# Altium PCB etapa_1.PcbDoc (part 2 of 2)
Units mm, origin at the board's own origin, x right, y up, seen from the top; angles counter-clockwise.
Board outline 39 x 30.7 mm, 4 copper layers (Top Layer, X, Y, Bottom Layer); 218 components, 89 nets, 624 pads, 178 vias.
Unrouted connection lines stored in the file: 2.
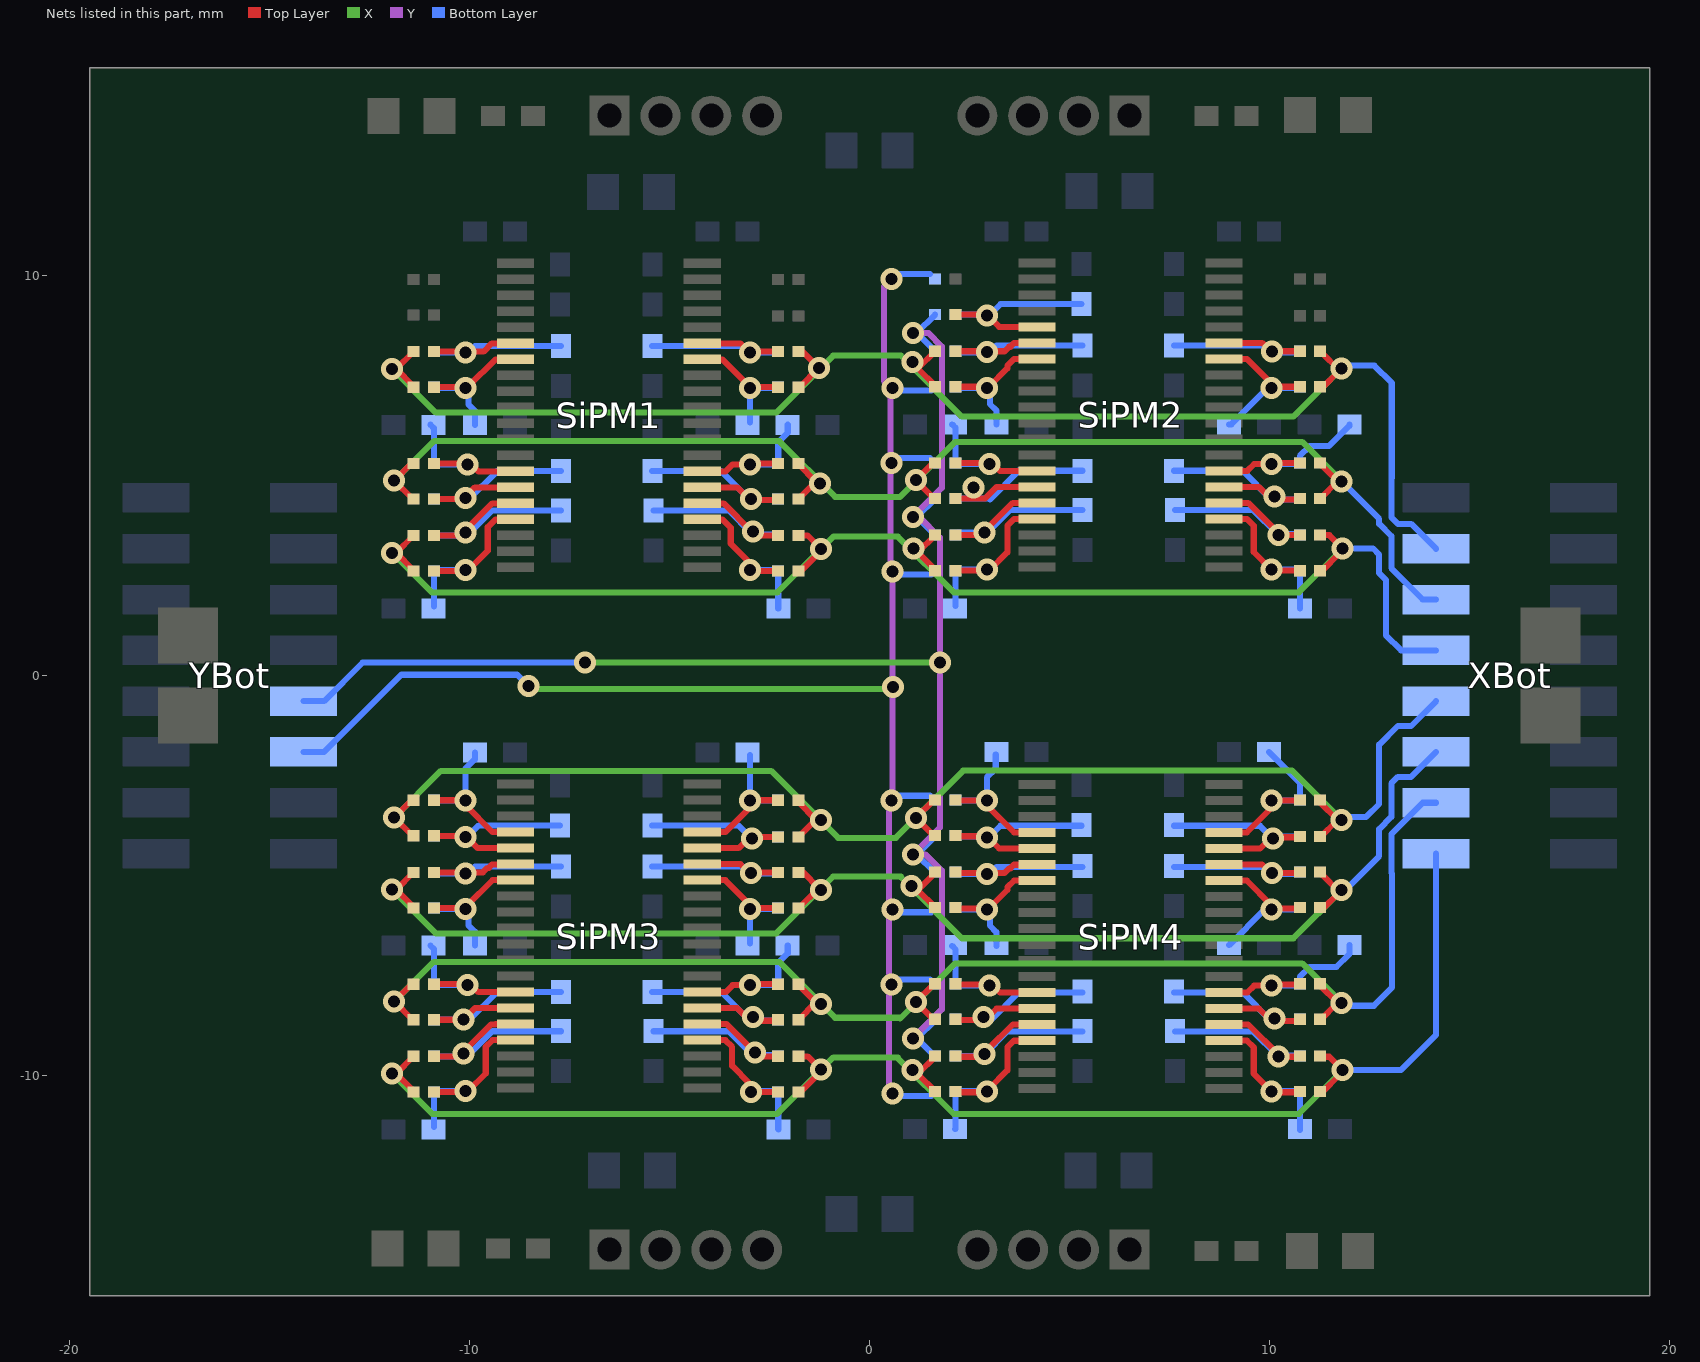
[diagram p4: the nets of this part, all layers, seen from the top]

## Via types
v1: diameter 0.55, hole 0.3, Top Layer to Bottom Layer, 154 vias
v2: diameter 0.6, hole 0.3, Top Layer to Bottom Layer, 24 vias

## Nets (pads, with @x,y where several pads share a name; then routed paths per layer and width w, separated by ;. In a path a pad name is that pad's centre, name@x,y a point inside that pad or via, vN(x,y) a via of type N, cw(c..) or ccw(c..) an arc to the next point about the centre after c; other vN are vias at no path point) (continued)
NetR7y_1: R7y.1 R15y.1 R23y.1 R31y.1 R39y.1 R47y.1 R55y.1 R63y.1 YBot.12 | length 45.3
  Y w0.152: v1@0.487,-10.358 0.487,-3.18 v1(0.543,-3.124) ; v1(0.543,9.916) 0.356,9.728 0.356,7.365 0.522,7.198 0.522,2.647 v1(0.569,2.601) v1@0.569,-3.099
  X w0.152: v1(-8.534,-0.254) -8.534,-0.406 -8.484,-0.457 -8.357,-0.33 0.559,-0.33 0.584,-0.305 v1(0.584,-0.279)
  Bottom Layer w0.152: YBot.12@-14.159,-1.905 -13.64,-1.905 -11.709,0.025 -8.814,0.025 v1(-8.534,-0.254) ; v1(0.543,-7.721) 0.666,-7.599 R55y.1@1.512,-7.599 ; v1(0.543,-3.124) 0.666,-3.001 R39y.1@1.512,-3.001 ; v1(0.543,5.319) 0.666,5.441 R23y.1@1.512,5.441 ; v1(0.543,9.916) 0.666,10.039 R7y.1@1.512,10.039 ; v1(0.569,-5.842) 0.64,-5.914 1.537,-5.914 R47y.1@1.634,-5.816 ; v1(0.569,2.601) 0.64,2.529 1.537,2.529 R31y.1@1.634,2.626 ; v1(0.569,7.198) 0.64,7.126 1.537,7.126 R15y.1@1.634,7.224 ; v1@0.64,-10.511 R63y.1@1.537,-10.511 ; v1(-8.534,-0.254) -8.534,-0.406 -8.382,-0.254 v1(-8.534,-0.254)
  other v1: 0.569,-10.439
NetR8n_2: R8n.2 R8x.2 R8y.2 SiPM2.16 | length 5.4
  Top Layer w0.152: R8x.2@2.144,9.027 2.931,9.027 3.238,8.72 SiPM2.16@4.185,8.72
  Bottom Layer w0.152: R8y.2@2.144,9.027 3.007,9.027 3.269,9.289 R8n.2@5.293,9.289
  other v1: 2.931,9.002
NetR8y_1: R8y.1 R16y.1 R24y.1 R32y.1 R40y.1 R48y.1 R56y.1 R64y.1 YBot.10 | length 41.4
  Y w0.152: v1(1.077,-9.068) 1.803,-8.341 1.803,-4.877 1.397,-4.47 v1(1.077,-4.47) 1.753,-3.794 v1(1.753,0.33) 1.753,3.454 1.235,3.972 v1(1.077,3.972) 1.803,4.699 1.803,8.23 1.463,8.57 v1(1.077,8.57)
  X w0.152: v1(-7.112,0.33) v1(1.753,0.33)
  Bottom Layer w0.152: YBot.10@-14.159,-0.635 -13.64,-0.635 -12.675,0.33 v1(-7.112,0.33) ; R64y.1@1.634,-9.525 1.177,-9.068 R56y.1@1.634,-8.61 ; R48y.1@1.634,-4.927 1.177,-4.47 R40y.1@1.634,-4.013 ; R32y.1@1.634,3.515 1.177,3.972 R24y.1@1.634,4.43 ; R16y.1@1.634,8.113 1.177,8.57 R8y.1@1.634,9.027
NetR9n_2: R9n.2 R9x.2 R9y.2 SiPM1.26 | length 5.2
  Top Layer w0.152: SiPM1.26@-4.185,8.31 -3.23,8.31 v1(-2.997,8.077) ; v1@-2.972,8.103 R9x.2@-2.287,8.103
  Bottom Layer w0.152: R9n.2@-5.436,8.247 -3.167,8.247 v1(-2.997,8.077) R9y.2@-2.287,8.077
NetR9x_1: R9x.1 R10x.1 R11x.1 R12x.1 R13x.1 R14x.1 R15x.1 R16x.1 XBot.14 | length 37.5
  Top Layer w0.152: R11x.1@-11.406,7.239 -11.837,7.671 R12x.1@-11.406,8.103 ; R10x.1@-1.777,7.214 -1.753,7.214 v1(-1.27,7.696) -1.676,8.103 R9x.1@-1.777,8.103 ; R15x.1@1.634,7.249 1.203,7.681 R16x.1@1.634,8.113 ; R14x.1@11.263,7.198 11.313,7.198 v1@11.745,7.63 ; R13x.1@11.263,8.087 11.287,8.087 v1@11.745,7.63 ; v1@11.695,7.63 v1@11.745,7.63 ; v1(11.795,7.681) v1@11.745,7.63
  X w0.152: v1(-11.938,7.671) -10.846,6.579 -2.337,6.579 -0.914,8.001 0.782,8.001 2.306,6.477 10.592,6.477 v1(11.795,7.681)
  Bottom Layer w0.152: v1(11.795,7.681) 11.867,7.753 12.618,7.753 13.05,7.321 13.05,4.938 13.041,4.929 13.041,3.961 13.205,3.797 13.536,3.797 XBot.14@14.159,3.175
  other v1: 1.067,7.849
NetR10n_2: R10n.2 R10x.2 R10y.2 SiPM1.27 | length 3.8
  Top Layer w0.152: SiPM1.27@-4.185,7.91 -3.685,7.91 -2.997,7.222 v1(-2.997,7.188) ; v1@-2.972,7.214 R10x.2@-2.287,7.214
  Bottom Layer w0.152: R10n.2@-2.997,6.333 v1(-2.997,7.188) R10y.2@-2.287,7.188
NetR11n_2: R11n.2 R11x.2 R11y.2 SiPM1.14 | length 4.3
  Top Layer w0.152: R11x.2@-10.955,7.214 -10.058,7.214 -10.033,7.188 -10.033,7.232 -9.355,7.91 SiPM1.14@-8.855,7.91
  Bottom Layer w0.152: R11y.2@-10.93,7.188 v1(-10.109,7.188) -10.033,7.188 -10.033,6.782 -9.873,6.621 R11n.2@-9.873,6.274
NetR12n_2: R12n.2 R12x.2 R12y.2 SiPM1.15 | length 5.2
  Top Layer w0.152: R12x.2@-10.896,8.103 -9.652,8.103 -9.445,8.31 SiPM1.15@-8.855,8.31
  Bottom Layer w0.152: R12y.2@-10.93,8.077 v1(-10.109,8.077) v1@-10.033,8.077 ; -9.863,8.247 R12n.2@-7.722,8.247
NetR13n_2: R13n.2 R13x.2 R13y.2 SiPM2.26 | length 5.2
  Top Layer w0.152: SiPM2.26@8.855,8.32 9.81,8.32 10.043,8.087 v1@10.058,8.103 ; v1@10.068,8.113 R13x.2@10.753,8.113
  Bottom Layer w0.152: R13n.2@7.604,8.257 9.873,8.257 v1@10.043,8.087 ; v1@10.058,8.103 v1@10.043,8.087 ; R13y.2@10.753,8.087 v1@10.043,8.087
  other v1: 10.058,8.103
NetR14n_2: R14n.2 R14x.2 R14y.2 SiPM2.27 | length 4.4
  Top Layer w0.152: SiPM2.27@8.855,7.92 9.43,7.92 10.043,7.307 v1(10.043,7.198) ; v1@10.068,7.224 R14x.2@10.753,7.224
  Bottom Layer w0.152: R14n.2@8.984,6.284 9.039,6.284 9.953,7.198 v1(10.043,7.198) R14y.2@10.753,7.198
NetR15n_2: R15n.2 R15x.2 R15y.2 SiPM2.14 | length 4.4
  Top Layer w0.152: R15x.2@2.085,7.224 v1@2.982,7.224 ; v1@3.007,7.242 3.007,7.198 v1@2.982,7.224 ; SiPM2.14@4.185,7.92 3.61,7.92 3.441,7.751 3.441,7.683 v1@2.982,7.224
  Bottom Layer w0.152: R15y.2@2.11,7.198 v1(2.931,7.198) 3.007,7.198 3.007,6.792 3.167,6.631 R15n.2@3.167,6.284
NetR16n_2: R16n.2 R16x.2 R16y.2 SiPM2.15 | length 5.2
  Top Layer w0.152: R16x.2@2.144,8.113 3.371,8.113 3.484,8.225 3.515,8.225 3.604,8.314 4.179,8.314 SiPM2.15@4.185,8.32
  Bottom Layer w0.152: R16y.2@2.11,8.087 v1(2.931,8.087) v1@3.007,8.087 ; 3.177,8.257 R16n.2@5.318,8.257
NetR17n_2: R17n.2 R17x.2 R17y.2 SiPM1.35 | length 5.5
  Top Layer w0.152: SiPM1.35@-4.185,4.71 -3.313,4.71 v1@-2.997,4.394 ; v1(-2.972,4.42) v1@-2.997,4.394 ; R17x.2@-2.312,4.394 v1@-2.997,4.394
  Bottom Layer w0.152: R17n.2@-5.436,5.113 -3.716,5.113 v1@-2.997,4.394 ; v1(-2.972,4.42) v1@-2.997,4.394 ; R17y.2@-2.287,4.394 v1@-2.997,4.394
NetR17x_1: R17x.1 R18x.1 R19x.1 R20x.1 R21x.1 R22x.1 R23x.1 R24x.1 XBot.12 | length 35
  Top Layer w0.152: v1@-11.837,4.877 v1(-11.887,4.877) ; R20x.1@-11.406,4.42 -11.43,4.42 v1(-11.887,4.877) ; R19x.1@-11.406,5.309 -11.455,5.309 v1(-11.887,4.877) ; R17x.1@-1.777,4.42 -1.345,4.851 R18x.1@-1.777,5.283 ; v1@1.203,4.887 v1(1.153,4.887) ; R24x.1@1.634,4.43 1.61,4.43 v1(1.153,4.887) ; R23x.1@1.634,5.319 1.585,5.319 v1(1.153,4.887) ; R21x.1@11.263,4.43 11.695,4.861 R22x.1@11.263,5.293
  X w0.152: v1(-11.887,4.877) -10.897,5.867 -2.261,5.867 -0.864,4.47 0.762,4.47 2.139,5.848 10.809,5.848 v1(11.795,4.861)
  Bottom Layer w0.152: v1(11.795,4.861) 12.736,3.921 12.736,3.797 13.041,3.492 13.041,2.691 13.827,1.905 XBot.12@14.159,1.905
  other v1: -1.245,4.801
NetR18n_2: R18n.2 R18x.2 R18y.2 SiPM1.34 | length 3.8
  Top Layer w0.152: SiPM1.34@-4.185,5.11 -3.602,5.11 -3.429,5.283 v1(-2.997,5.283) -2.972,5.309 R18x.2@-2.287,5.309
  Bottom Layer w0.152: v1(-2.997,5.283) R18y.2@-2.287,5.283 ; R18y.2@-2.287,5.309 -2.287,5.841 -2.049,6.079 R18n.2@-2.049,6.274
NetR19n_2: R19n.2 R19x.2 R19y.2 SiPM1.7 | length 4.1
  Top Layer w0.152: R19x.2@-10.955,5.309 -10.058,5.309 -10.033,5.283 -9.957,5.283 -9.784,5.11 SiPM1.7@-8.855,5.11
  Bottom Layer w0.152: R19n.2@-10.981,6.274 -10.896,6.189 R19y.2@-10.896,5.309 ; R19y.2@-10.921,5.283 v1(-10.049,5.283) v1@-10.033,5.283
NetR20n_2: R20n.2 R20x.2 R20y.2 SiPM1.6 | length 5.8
  Top Layer w0.152: R20x.2@-10.955,4.42 -10.16,4.42 -9.87,4.71 SiPM1.6@-8.855,4.71
  Bottom Layer w0.152: R20y.2@-10.955,4.42 v1@-10.058,4.42 ; v1@-10.084,4.445 v1@-10.058,4.42 ; R20n.2@-7.722,5.113 -9.314,5.113 -10.033,4.394 v1@-10.058,4.42
  other v1: -10.109,4.445
NetR21n_2: R21n.2 R21x.2 R21y.2 SiPM2.35 | length 6
  Top Layer w0.152: SiPM2.35@8.855,4.72 9.727,4.72 v1@10.043,4.404 ; v1@10.185,4.597 10.185,4.547 v1(10.114,4.476) v1@10.043,4.404 ; R21x.2@10.728,4.404 v1@10.043,4.404
  Bottom Layer w0.152: R21n.2@7.604,5.123 9.324,5.123 v1@10.043,4.404 ; v1@10.185,4.597 10.185,4.547 v1(10.114,4.476) v1@10.043,4.404 ; R21y.2@10.753,4.404 v1@10.043,4.404
NetR22n_2: R22n.2 R22x.2 R22y.2 SiPM2.34 | length 4.5
  Top Layer w0.152: SiPM2.34@8.855,5.12 9.438,5.12 9.611,5.293 v1(10.043,5.293) 10.068,5.319 R22x.2@10.753,5.319
  Bottom Layer w0.152: v1(10.043,5.293) R22y.2@10.753,5.293 ; R22y.2@10.753,5.319 10.753,5.494 10.997,5.738 11.481,5.738 11.991,6.248 R22n.2@11.991,6.284
NetR23n_2: R23n.2 R23x.2 R23y.2 SiPM2.7 | length 4.1
  Top Layer w0.152: R23x.2@2.085,5.319 2.982,5.319 3.007,5.293 3.083,5.293 3.256,5.12 SiPM2.7@4.185,5.12
  Bottom Layer w0.152: R23n.2@2.059,6.284 2.144,6.199 R23y.2@2.144,5.319 ; R23y.2@2.119,5.293 v1(2.991,5.293) v1@3.007,5.293
NetR24n_2: R24n.2 R24x.2 R24y.2 SiPM2.6 | length 5.8
  Top Layer w0.152: R24x.2@2.085,4.43 2.88,4.43 3.17,4.72 SiPM2.6@4.185,4.72
  Bottom Layer w0.152: R24y.2@2.085,4.43 2.982,4.43 ; 2.956,4.455 2.982,4.43 ; R24n.2@5.318,5.123 3.726,5.123 3.007,4.404 2.982,4.43
  other v1: 2.59,4.7
NetR25n_2: R25n.2 R25x.2 R25y.2 SiPM1.36 | length 5.8
  Top Layer w0.152: SiPM1.36@-4.185,4.31 -3.654,4.31 -2.946,3.602 -2.946,3.531 -2.921,3.531 v1(-2.921,3.607) -2.819,3.505 R25x.2@-2.287,3.505
  Bottom Layer w0.152: R25n.2@-5.41,4.132 -3.527,4.132 -2.959,3.564 v1@-2.921,3.531 ; v1(-2.921,3.607) v1@-2.921,3.531 ; R25y.2@-2.287,3.531 v1@-2.921,3.531
NetR25x_1: R25x.1 R26x.1 R27x.1 R28x.1 R29x.1 R30x.1 R31x.1 R32x.1 XBot.10 | length 35.5
  Top Layer w0.152: R27x.1@-11.406,2.642 -11.837,3.073 R28x.1@-11.406,3.505 ; R26x.1@-1.777,2.616 -1.727,2.616 -1.217,3.126 v1(-1.217,3.171) -1.552,3.505 R25x.1@-1.777,3.505 ; R31x.1@1.634,2.652 1.203,3.083 R32x.1@1.634,3.515 ; R30x.1@11.263,2.626 11.313,2.626 v1@11.745,3.058 ; R29x.1@11.263,3.515 11.488,3.515 v1(11.823,3.181) ; v1@11.695,3.058 v1@11.745,3.058 ; v1@11.745,3.058 v1@11.823,3.136 ; v1@11.823,3.136 11.845,3.158 v1(11.823,3.181) ; v1@11.823,3.136 v1(11.823,3.181)
  X w0.152: v1(-11.938,3.073) -10.947,2.083 -2.305,2.083 v1(-1.217,3.171) -0.908,3.48 0.706,3.48 2.103,2.083 10.725,2.083 v1(11.823,3.181)
  Bottom Layer w0.152: 12.125,3.181 12.584,3.181 12.736,3.028 12.736,2.565 12.906,2.394 12.906,1.013 13.284,0.635 XBot.10@14.159,0.635
  other v1: 1.092,3.175
NetR26n_2: R26n.2 R26x.2 R26y.2 SiPM1.37 | length 4.4
  Top Layer w0.152: SiPM1.37@-4.185,3.91 -3.685,3.91 -3.475,3.7 -3.475,3.301 -2.997,2.823 v1(-2.997,2.642) -2.972,2.616 R26x.2@-2.287,2.616
  Bottom Layer w0.152: v1(-2.997,2.642) R26y.2@-2.287,2.642 ; R26y.2@-2.287,2.616 -2.287,1.685 R26n.2@-2.278,1.676
NetR27n_2: R27n.2 R27x.2 R27y.2 SiPM1.4 | length 4.8
  Top Layer w0.152: R27x.2@-10.955,2.616 v1@-10.058,2.616 ; v1@-10.033,2.747 -10.033,2.642 -9.55,3.124 -9.55,3.714 -9.355,3.91 SiPM1.4@-8.855,3.91
  Bottom Layer w0.152: R27y.2@-10.93,2.642 v1(-10.109,2.642) v1@-10.033,2.642 ; R27n.2@-10.896,1.736 R27y.2@-10.896,2.616
NetR28n_2: R28n.2 R28x.2 R28y.2 SiPM1.5 | length 6.1
  Top Layer w0.152: R28x.2@-10.955,3.505 -10.058,3.505 v1@-10.033,3.531 ; v1(-10.109,3.581) v1@-10.084,3.581 ; v1@-10.033,3.663 v1@-10.033,3.531 ; SiPM1.5@-8.855,4.31 -9.431,4.31 -10.084,3.658 v1@-10.084,3.581 ; v1@-10.084,3.581 v1@-10.033,3.531
  Bottom Layer w0.152: R28y.2@-10.896,3.505 v1@-10.185,3.505 ; v1(-10.109,3.581) -10.084,3.581 -10.033,3.531 -9.431,4.132 R28n.2@-7.722,4.132
NetR29n_2: R29n.2 R29x.2 R29y.2 SiPM2.36 | length 6.1
  Top Layer w0.152: SiPM2.36@8.855,4.32 9.461,4.32 10.221,3.561 v1(10.221,3.515) ; v1@10.094,3.612 10.094,3.541 10.119,3.541 10.119,3.617 v1(10.221,3.515) ; R29x.2@10.753,3.515 v1(10.221,3.515)
  Bottom Layer w0.152: R29n.2@7.63,4.142 9.594,4.142 v1@10.195,3.541 ; v1@10.119,3.541 v1@10.195,3.541 ; v1(10.221,3.515) v1@10.195,3.541 ; R29y.2@10.753,3.541 v1@10.195,3.541
NetR30n_2: R30n.2 R30x.2 R30y.2 SiPM2.37 | length 4.7
  Top Layer w0.152: SiPM2.37@8.855,3.92 9.43,3.92 9.601,3.749 9.601,3.093 v1(10.043,2.652) ; v1@10.043,2.833 v1(10.043,2.652) ; R30x.2@10.753,2.626 10.068,2.626 v1(10.043,2.652)
  Bottom Layer w0.152: v1(10.043,2.652) R30y.2@10.753,2.652 ; R30y.2@10.753,2.626 10.753,1.695 R30n.2@10.762,1.686
NetR31n_2: R31n.2 R31x.2 R31y.2 SiPM2.4 | length 4.9
  Top Layer w0.152: R31x.2@2.085,2.626 v1@2.982,2.626 ; v1@3.007,2.757 3.007,2.652 3.441,3.085 3.441,3.751 3.61,3.92 SiPM2.4@4.185,3.92
  Bottom Layer w0.152: R31y.2@2.11,2.652 v1(2.931,2.652) v1@3.007,2.652 ; R31n.2@2.144,1.746 R31y.2@2.144,2.626
NetR32n_2: R32n.2 R32x.2 R32y.2 SiPM2.5 | length 6.2
  Top Layer w0.152: R32x.2@2.085,3.515 2.982,3.515 v1@3.007,3.541 ; v1(2.87,3.581) 2.921,3.581 2.931,3.591 v1@2.956,3.591 ; v1@3.007,3.673 v1@3.007,3.541 ; SiPM2.5@4.185,4.32 3.579,4.32 2.956,3.697 v1@2.956,3.591 ; v1@2.956,3.591 v1@3.007,3.541
  Bottom Layer w0.152: R32y.2@2.211,3.581 v1(2.87,3.581) 2.921,3.581 2.931,3.591 2.956,3.591 3.507,4.142 R32n.2@5.318,4.142
NetR33n_2: R33n.2 R33x.2 R33y.2 SiPM3.25 | length 5.3
  Top Layer w0.152: SiPM3.25@-4.185,-4.31 -3.279,-4.31 v1@-2.997,-4.028 ; v1(-2.946,-4.064) -2.962,-4.064 v1@-2.997,-4.028 ; R33x.2@-2.287,-4.028 v1@-2.997,-4.028
  Bottom Layer w0.152: R33n.2@-5.436,-3.741 -3.285,-3.741 -2.962,-4.064 v1(-2.946,-4.064) ; v1@-2.926,-4.028 R33y.2@-2.287,-4.028
NetR33x_1: R33x.1 R34x.1 R35x.1 R36x.1 R37x.1 R38x.1 R39x.1 R40x.1 XBot.8 | length 35.7
  Top Layer w0.152: v1@-11.837,-3.546 v1(-11.887,-3.546) ; R36x.1@-11.406,-4.003 -11.43,-4.003 v1(-11.887,-3.546) ; R35x.1@-11.406,-3.114 -11.455,-3.114 v1(-11.887,-3.546) ; R33x.1@-1.777,-4.028 -1.345,-3.597 R34x.1@-1.777,-3.165 ; R40x.1@1.634,-4.013 1.61,-4.013 v1(1.153,-3.556) 1.585,-3.124 R39x.1@1.634,-3.124 ; R37x.1@11.263,-4.038 11.695,-3.607 R38x.1@11.263,-3.175
  X w0.152: v1(-11.887,-3.546) -10.719,-2.377 -2.464,-2.377 -0.787,-4.054 0.655,-4.054 v1(1.153,-3.556) 2.337,-2.372 10.561,-2.372 v1(11.795,-3.607)
  Bottom Layer w0.152: v1(11.795,-3.607) 11.911,-3.491 11.952,-3.531 12.411,-3.531 12.736,-3.207 12.736,-1.726 13.205,-1.257 13.536,-1.257 XBot.8@14.159,-0.635
  other v1: -1.219,-3.607
NetR34n_2: R34n.2 R34x.2 R34y.2 SiPM3.24 | length 4.1
  Top Layer w0.152: SiPM3.24@-4.185,-3.91 -3.61,-3.91 -2.997,-3.297 v1(-2.997,-3.114) ; v1@-2.889,-3.114 R34x.2@-2.287,-3.114
  Bottom Layer w0.152: R34n.2@-2.997,-1.979 v1(-2.997,-3.114) R34y.2@-2.304,-3.114
NetR35n_2: R35n.2 R35x.2 R35y.2 SiPM3.17 | length 4.6
  Top Layer w0.152: R35x.2@-10.955,-3.114 R35x.2@-10.896,-3.114 v1(-10.109,-3.114) -10.109,-3.231 -9.43,-3.91 SiPM3.17@-8.855,-3.91
  Bottom Layer w0.152: R35y.2@-10.955,-3.114 R35y.2@-10.896,-3.114 v1(-10.109,-3.114) -10.109,-2.327 -9.873,-2.09 R35n.2@-9.873,-1.92
NetR36n_2: R36n.2 R36x.2 R36y.2 SiPM3.16 | length 5.4
  Top Layer w0.152: R36x.2@-10.896,-4.003 -10.109,-4.003 -9.802,-4.31 SiPM3.16@-8.855,-4.31
  Bottom Layer w0.152: R36y.2@-10.896,-4.003 -10.033,-4.003 -9.771,-3.741 R36n.2@-7.747,-3.741
  other v1: -10.109,-4.028
NetR37n_2: R37n.2 R37x.2 R37y.2 SiPM4.25 | length 5.3
  Top Layer w0.152: SiPM4.25@8.855,-4.32 9.761,-4.32 v1@10.043,-4.038 ; v1(10.084,-4.074) 10.078,-4.074 v1@10.043,-4.038 ; R37x.2@10.753,-4.038 v1@10.043,-4.038
  Bottom Layer w0.152: R37n.2@7.604,-3.751 9.755,-3.751 10.078,-4.074 v1(10.084,-4.074) ; v1@10.134,-4.018 R37y.2@10.753,-4.018
NetR38n_2: R38n.2 R38x.2 R38y.2 SiPM4.24 | length 4.4
  Top Layer w0.152: SiPM4.24@8.855,-3.92 9.43,-3.92 10.043,-3.307 v1(10.043,-3.124) ; v1@10.151,-3.124 R38x.2@10.753,-3.124
  Bottom Layer w0.152: R38n.2@9.984,-1.91 10.753,-2.679 R38y.2@10.753,-3.104 ; v1(10.043,-3.124) R38y.2@10.736,-3.124
NetR39n_2: R39n.2 R39x.2 R39y.2 SiPM4.17 | length 4.6
  Top Layer w0.152: R39x.2@2.085,-3.124 v1(2.931,-3.124) 2.931,-3.241 3.61,-3.92 SiPM4.17@4.185,-3.92
  Bottom Layer w0.152: R39y.2@2.085,-3.124 2.144,-3.124 v1(2.931,-3.124) 2.931,-2.54 3.15,-2.321 R39n.2@3.15,-1.966
NetR40n_2: R40n.2 R40x.2 R40y.2 SiPM4.16 | length 5.4
  Top Layer w0.152: R40x.2@2.143,-4.013 2.931,-4.013 3.238,-4.32 SiPM4.16@4.185,-4.32
  Bottom Layer w0.152: R40y.2@2.144,-4.013 3.007,-4.013 3.269,-3.751 R40n.2@5.293,-3.751
  other v1: 2.931,-4.038
NetR41n_2: R41n.2 R41x.2 R41y.2 SiPM3.26 | length 5.3
  Top Layer w0.152: SiPM3.26@-4.185,-4.71 -3.23,-4.71 -2.997,-4.943 -2.982,-4.928 v1(-2.972,-4.928) ; v1@-2.972,-4.917 R41x.2@-2.287,-4.917
  Bottom Layer w0.152: R41n.2@-5.436,-4.773 -3.167,-4.773 v1@-2.997,-4.943 ; v1(-2.972,-4.928) -2.982,-4.928 v1@-2.997,-4.943 ; R41y.2@-2.287,-4.943 v1@-2.997,-4.943
NetR41x_1: R41x.1 R42x.1 R43x.1 R44x.1 R45x.1 R46x.1 R47x.1 R48x.1 XBot.6 | length 35.9
  Top Layer w0.152: R43x.1@-11.406,-5.781 -11.837,-5.349 R44x.1@-11.406,-4.917 ; R42x.1@-1.777,-5.806 -1.768,-5.806 -1.27,-5.309 -1.661,-4.917 R41x.1@-1.777,-4.917 ; R47x.1@1.634,-5.791 1.203,-5.359 R48x.1@1.634,-4.927 ; R46x.1@11.263,-5.842 11.313,-5.842 v1@11.745,-5.41 ; R45x.1@11.263,-4.953 11.287,-4.953 v1@11.745,-5.41 ; v1@11.695,-5.41 v1@11.745,-5.41 ; v1(11.795,-5.359) v1@11.745,-5.41
  X w0.152: v1(-11.938,-5.349) -10.846,-6.441 -2.337,-6.441 -0.914,-5.019 0.782,-5.019 ; 0.782,-5.039 2.306,-6.563 10.592,-6.563 v1(11.795,-5.359)
  Bottom Layer w0.152: v1(11.795,-5.359) 11.887,-5.359 12.736,-4.51 12.736,-3.835 13.041,-3.53 13.041,-2.691 13.205,-2.527 13.536,-2.527 XBot.6@14.159,-1.905
  other v1: -1.219,-5.359 1.041,-5.258
NetR42n_2: R42n.2 R42x.2 R42y.2 SiPM3.27 | length 3.8
  Top Layer w0.152: SiPM3.27@-4.185,-5.11 -3.61,-5.11 -2.997,-5.723 v1(-2.997,-5.832) ; v1@-2.972,-5.806 R42x.2@-2.287,-5.806
  Bottom Layer w0.152: R42n.2@-2.997,-6.687 v1(-2.997,-5.832) R42y.2@-2.287,-5.832
NetR43n_2: R43n.2 R43x.2 R43y.2 SiPM3.14 | length 4.4
  Top Layer w0.152: R43x.2@-10.955,-5.806 v1@-10.058,-5.806 ; v1@-10.033,-5.788 -10.033,-5.832 v1@-10.058,-5.806 ; SiPM3.14@-8.855,-5.11 -9.43,-5.11 -10.058,-5.738 v1@-10.058,-5.806
  Bottom Layer w0.152: R43y.2@-10.93,-5.832 v1(-10.109,-5.832) -10.033,-5.832 -10.033,-6.238 -9.873,-6.399 R43n.2@-9.873,-6.746
NetR44n_2: R44n.2 R44x.2 R44y.2 SiPM3.15 | length 5.2
  Top Layer w0.152: R44x.2@-10.896,-4.917 -9.669,-4.917 -9.556,-4.805 -9.525,-4.805 -9.436,-4.716 -8.861,-4.716 SiPM3.15@-8.855,-4.71
  Bottom Layer w0.152: R44y.2@-10.93,-4.943 v1(-10.109,-4.943) v1@-10.033,-4.943 ; -9.863,-4.773 R44n.2@-7.722,-4.773
NetR45n_2: R45n.2 R45x.2 R45y.2 SiPM4.26 | length 5.2
  Top Layer w0.152: SiPM4.26@8.855,-4.72 9.81,-4.72 10.043,-4.953 v1@10.058,-4.937 ; v1@10.068,-4.927 R45x.2@10.753,-4.927
  Bottom Layer w0.152: R45n.2@7.604,-4.783 9.873,-4.783 v1@10.043,-4.953 ; v1@10.058,-4.937 v1@10.043,-4.953 ; R45y.2@10.753,-4.953 v1@10.043,-4.953
  other v1: 10.058,-4.937
NetR46n_2: R46n.2 R46x.2 R46y.2 SiPM4.27 | length 4.4
  Top Layer w0.152: SiPM4.27@8.855,-5.12 9.43,-5.12 10.043,-5.733 v1(10.043,-5.842) ; v1@10.068,-5.816 R46x.2@10.753,-5.816
  Bottom Layer w0.152: R46n.2@8.984,-6.736 9.878,-5.842 v1(10.043,-5.842) R46y.2@10.753,-5.842
NetR47n_2: R47n.2 R47x.2 R47y.2 SiPM4.14 | length 4.4
  Top Layer w0.152: R47x.2@2.085,-5.816 v1@2.982,-5.816 ; v1@3.007,-5.798 3.007,-5.842 v1@2.982,-5.816 ; SiPM4.14@4.185,-5.12 3.61,-5.12 3.441,-5.289 3.441,-5.357 v1@2.982,-5.816
  Bottom Layer w0.152: R47y.2@2.11,-5.842 v1(2.931,-5.842) 3.007,-5.842 3.007,-6.248 3.167,-6.409 R47n.2@3.167,-6.736 R47n.2@3.167,-6.756
NetR48n_2: R48n.2 R48x.2 R48y.2 SiPM4.15 | length 5.2
  Top Layer w0.152: R48x.2@2.144,-4.927 3.371,-4.927 3.484,-4.815 3.515,-4.815 3.604,-4.726 4.179,-4.726 SiPM4.15@4.185,-4.72
  Bottom Layer w0.152: R48y.2@2.11,-4.953 v1(2.931,-4.953) v1@3.007,-4.953 ; 3.177,-4.783 R48n.2@5.318,-4.783
NetR49n_2: R49n.2 R49x.2 R49y.2 SiPM3.35 | length 5.7
  Top Layer w0.152: SiPM3.35@-4.185,-8.31 -3.313,-8.31 v1@-2.997,-8.626 ; v1(-2.921,-8.534) -2.946,-8.56 -2.946,-8.575 v1@-2.997,-8.626 ; R49x.2@-2.312,-8.626 v1@-2.997,-8.626
  Bottom Layer w0.152: R49n.2@-5.436,-7.907 -3.716,-7.907 v1@-2.997,-8.626 ; v1(-2.921,-8.534) -2.946,-8.56 -2.946,-8.575 v1@-2.997,-8.626 ; R49y.2@-2.287,-8.626 v1@-2.997,-8.626
NetR49x_1: R49x.1 R50x.1 R51x.1 R52x.1 R53x.1 R54x.1 R55x.1 R56x.1 XBot.4 | length 37.6
  Top Layer w0.152: v1@-11.837,-8.143 v1(-11.887,-8.143) ; R52x.1@-11.406,-8.6 -11.43,-8.6 v1(-11.887,-8.143) ; R51x.1@-11.406,-7.711 -11.455,-7.711 v1(-11.887,-8.143) ; R49x.1@-1.777,-8.6 -1.345,-8.169 R50x.1@-1.777,-7.737 ; v1@1.203,-8.153 v1(1.153,-8.153) ; R56x.1@1.634,-8.61 1.61,-8.61 v1(1.153,-8.153) ; R55x.1@1.634,-7.721 1.585,-7.721 v1(1.153,-8.153) ; R53x.1@11.263,-8.61 11.695,-8.179 R54x.1@11.263,-7.747
  X w0.152: v1(-11.887,-8.143) -10.897,-7.153 -2.261,-7.153 -0.864,-8.55 0.762,-8.55 ; 0.762,-8.57 2.139,-7.192 10.809,-7.192 v1(11.795,-8.179)
  Bottom Layer w0.152: v1(11.795,-8.179) 11.867,-8.25 12.603,-8.25 13.06,-7.793 13.06,-4.948 13.041,-4.929 13.041,-3.961 13.827,-3.175 XBot.4@14.159,-3.175
  other v1: -1.219,-8.204
NetR50n_2: R50n.2 R50x.2 R50y.2 SiPM3.34 | length 3.8
  Top Layer w0.152: SiPM3.34@-4.185,-7.91 -3.602,-7.91 -3.429,-7.737 v1(-2.997,-7.737) -2.972,-7.711 R50x.2@-2.287,-7.711
  Bottom Layer w0.152: v1(-2.997,-7.737) R50y.2@-2.287,-7.737 ; R50y.2@-2.287,-7.711 -2.287,-7.179 -2.049,-6.941 R50n.2@-2.049,-6.746
NetR51n_2: R51n.2 R51x.2 R51y.2 SiPM3.7 | length 4.1
  Top Layer w0.152: R51x.2@-10.955,-7.711 -10.058,-7.711 -10.033,-7.737 -9.957,-7.737 -9.784,-7.91 SiPM3.7@-8.855,-7.91
  Bottom Layer w0.152: R51n.2@-10.981,-6.746 -10.896,-6.831 R51y.2@-10.896,-7.711 ; R51y.2@-10.921,-7.737 v1(-10.049,-7.737) v1@-10.033,-7.737
NetR52n_2: R52n.2 R52x.2 R52y.2 SiPM3.6 | length 5.8
  Top Layer w0.152: R52x.2@-10.955,-8.6 v1(-10.16,-8.6) -9.87,-8.31 SiPM3.6@-8.855,-8.31
  Bottom Layer w0.152: R52y.2@-10.955,-8.6 v1(-10.16,-8.6) v1@-10.058,-8.6 ; v1@-10.084,-8.575 v1@-10.058,-8.6 ; R52n.2@-7.722,-7.907 -9.314,-7.907 -10.033,-8.626 v1@-10.058,-8.6
NetR53n_2: R53n.2 R53x.2 R53y.2 SiPM4.35 | length 6
  Top Layer w0.152: SiPM4.35@8.855,-8.32 9.727,-8.32 v1@10.043,-8.636 ; v1@10.185,-8.443 10.185,-8.493 v1(10.114,-8.564) v1@10.043,-8.636 ; R53x.2@10.728,-8.636 v1@10.043,-8.636
  Bottom Layer w0.152: R53n.2@7.604,-7.917 9.324,-7.917 v1@10.043,-8.636 ; v1@10.185,-8.443 10.185,-8.493 v1(10.114,-8.564) v1@10.043,-8.636 ; R53y.2@10.753,-8.636 v1@10.043,-8.636
NetR54n_2: R54n.2 R54x.2 R54y.2 SiPM4.34 | length 4.6
  Top Layer w0.152: SiPM4.34@8.855,-7.92 9.438,-7.92 9.611,-7.747 v1(10.043,-7.747) 10.068,-7.721 R54x.2@10.753,-7.721
  Bottom Layer w0.152: v1(10.043,-7.747) R54y.2@10.753,-7.747 ; R54y.2@10.753,-7.721 R54y.2@10.753,-7.701 10.753,-7.526 10.997,-7.282 11.666,-7.282 11.991,-6.958 R54n.2@11.991,-6.736
NetR55n_2: R55n.2 R55x.2 R55y.2 SiPM4.7 | length 4.1
  Top Layer w0.152: R55x.2@2.085,-7.721 2.982,-7.721 3.007,-7.747 3.083,-7.747 3.256,-7.92 SiPM4.7@4.185,-7.92
  Bottom Layer w0.152: R55n.2@2.059,-6.756 2.144,-6.841 R55y.2@2.144,-7.701 R55y.2@2.144,-7.721 ; R55y.2@2.119,-7.747 v1(2.991,-7.747) v1@3.007,-7.747
NetR56n_2: R56n.2 R56x.2 R56y.2 SiPM4.6 | length 5.8
  Top Layer w0.152: R56x.2@2.085,-8.61 2.845,-8.61 2.88,-8.61 3.17,-8.32 SiPM4.6@4.185,-8.32
  Bottom Layer w0.152: R56y.2@2.085,-8.61 v1@2.982,-8.61 ; v1@2.956,-8.585 v1@2.982,-8.61 ; R56n.2@5.318,-7.917 3.726,-7.917 3.007,-8.636 v1@2.982,-8.61
  other v1: 2.845,-8.534
NetR57n_2: R57n.2 R57x.2 R57y.2 SiPM3.36 | length 5.9
  Top Layer w0.152: SiPM3.36@-4.185,-8.71 -3.579,-8.71 -2.921,-9.368 v1@-2.921,-9.413 ; v1@-2.946,-9.489 -2.921,-9.489 v1@-2.921,-9.413 ; v1@-2.946,-9.423 v1@-2.946,-9.418 ; v1(-2.87,-9.423) v1@-2.911,-9.423 ; R57x.2@-2.287,-9.515 -2.819,-9.515 v1@-2.911,-9.423 ; v1@-2.921,-9.413 v1@-2.911,-9.423
  Bottom Layer w0.152: R57n.2@-5.41,-8.888 -3.527,-8.888 -2.959,-9.456 -2.925,-9.486 v1@-2.921,-9.489 ; v1(-2.87,-9.423) -2.911,-9.423 -2.921,-9.413 v1@-2.921,-9.489 ; R57y.2@-2.287,-9.489 v1@-2.921,-9.489
NetR57x_1: R57x.1 R58x.1 R59x.1 R60x.1 R61x.1 R62x.1 R63x.1 R64x.1 XBot.2 | length 38.6
  Top Layer w0.152: R59x.1@-11.406,-10.378 -11.837,-9.947 R60x.1@-11.406,-9.515 ; R58x.1@-1.777,-10.404 -1.727,-10.404 -1.217,-9.894 v1(-1.217,-9.849) -1.552,-9.515 R57x.1@-1.777,-9.515 ; R63x.1@1.634,-10.388 1.203,-9.957 R64x.1@1.634,-9.525 ; R62x.1@11.263,-10.414 11.313,-10.414 v1@11.745,-9.982 ; R61x.1@11.263,-9.525 11.488,-9.525 v1(11.823,-9.859) ; v1@11.695,-9.982 v1@11.745,-9.982 ; v1@11.745,-9.982 v1@11.823,-9.904 ; v1@11.823,-9.904 11.845,-9.882 v1(11.823,-9.859) ; v1@11.823,-9.904 v1(11.823,-9.859)
  X w0.152: v1(-11.938,-9.947) -10.926,-10.958 -2.326,-10.958 v1(-1.217,-9.849) -0.908,-9.54 0.706,-9.54 ; 0.706,-9.56 2.103,-10.957 10.725,-10.957 v1(11.823,-9.859)
  Bottom Layer w0.152: v1(11.823,-9.859) 13.28,-9.859 14.159,-8.981 XBot.2@14.159,-4.445
  other v1: 1.067,-9.855
NetR58n_2: R58n.2 R58x.2 R58y.2 SiPM3.37 | length 4.5
  Top Layer w0.152: SiPM3.37@-4.185,-9.11 -3.61,-9.11 -3.441,-9.279 -3.441,-9.754 -2.997,-10.197 -2.997,-10.378 v1(-2.972,-10.404) R58x.2@-2.287,-10.404
  Bottom Layer w0.152: v1(-2.972,-10.404) -2.997,-10.378 R58y.2@-2.287,-10.378 ; R58y.2@-2.287,-10.404 -2.287,-11.335 R58n.2@-2.278,-11.344
NetR59n_2: R59n.2 R59x.2 R59y.2 SiPM3.4 | length 4.9
  Top Layer w0.152: R59x.2@-10.955,-10.404 v1@-10.058,-10.404 ; v1@-10.033,-10.273 -10.033,-10.378 -9.599,-9.945 -9.599,-9.279 -9.43,-9.11 SiPM3.4@-8.855,-9.11
  Bottom Layer w0.152: R59y.2@-10.93,-10.378 v1(-10.109,-10.378) v1@-10.033,-10.378 ; R59n.2@-10.896,-11.284 R59y.2@-10.896,-10.404
NetR60n_2: R60n.2 R60x.2 R60y.2 SiPM3.5 | length 6.2
  Top Layer w0.152: R60x.2@-10.955,-9.515 -10.058,-9.515 v1@-10.033,-9.489 ; v1(-10.16,-9.449) -10.15,-9.439 v1@-10.084,-9.439 ; SiPM3.5@-8.855,-8.71 -9.355,-8.71 -9.361,-8.716 -9.467,-8.716 -10.033,-9.282 v1@-10.033,-9.388 ; v1@-10.084,-9.439 v1@-10.033,-9.489 ; v1@-10.084,-9.439 v1@-10.033,-9.388 ; v1@-10.033,-9.489 v1@-10.033,-9.388
  Bottom Layer w0.152: R60y.2@-10.896,-9.515 v1@-10.226,-9.515 ; v1(-10.16,-9.449) -10.15,-9.439 -10.084,-9.439 -10.033,-9.489 -9.431,-8.888 R60n.2@-7.722,-8.888
NetR61n_2: R61n.2 R61x.2 R61y.2 SiPM4.36 | length 6.1
  Top Layer w0.152: SiPM4.36@8.855,-8.72 9.461,-8.72 10.221,-9.479 v1(10.221,-9.525) ; v1@10.094,-9.428 10.094,-9.499 10.119,-9.499 10.119,-9.423 v1(10.221,-9.525) ; R61x.2@10.753,-9.525 v1(10.221,-9.525)
  Bottom Layer w0.152: R61n.2@7.63,-8.898 9.594,-8.898 v1@10.195,-9.499 ; v1@10.119,-9.499 v1@10.195,-9.499 ; v1(10.221,-9.525) v1@10.195,-9.499 ; R61y.2@10.753,-9.499 v1@10.195,-9.499
NetR62n_2: R62n.2 R62x.2 R62y.2 SiPM4.37 | length 4.7
  Top Layer w0.152: SiPM4.37@8.855,-9.12 9.43,-9.12 9.601,-9.291 9.601,-9.947 v1(10.043,-10.388) ; v1@10.043,-10.207 v1(10.043,-10.388) ; R62x.2@10.753,-10.414 10.068,-10.414 v1(10.043,-10.388)
  Bottom Layer w0.152: v1(10.043,-10.388) R62y.2@10.753,-10.388 ; R62y.2@10.753,-10.414 10.753,-11.345 R62n.2@10.762,-11.354
NetR63n_2: R63n.2 R63x.2 R63y.2 SiPM4.4 | length 4.8
  Top Layer w0.152: R63x.2@2.085,-10.414 2.982,-10.414 2.982,-10.323 3.441,-9.864 3.441,-9.289 3.604,-9.126 4.179,-9.126 SiPM4.4@4.185,-9.12
  Bottom Layer w0.152: R63y.2@2.11,-10.388 v1(2.931,-10.388) ; R63n.2@2.135,-11.334 2.144,-11.325 R63y.2@2.144,-10.394
NetR64n_2: R64n.2 R64x.2 R64y.2 SiPM4.5 | length 5.7
  Top Layer w0.152: R64x.2@2.085,-9.525 v1@2.982,-9.525 ; v1@2.956,-9.343 3.579,-8.72 SiPM4.5@4.185,-8.72
  Bottom Layer w0.152: R64y.2@2.144,-9.505 v1@2.824,-9.505 ; v1(2.87,-9.459) 3.431,-8.898 R64n.2@5.318,-8.898
pads on no net: P1.3 P1.4 P2.3 P2.4 P3.3 P3.4 P4.3 P4.4 SiPM1.3 SiPM1.8 SiPM1.13 SiPM1.18 SiPM1.23 SiPM1.28 SiPM1.33 SiPM1.38 SiPM2.3 SiPM2.8 SiPM2.13 SiPM2.18 SiPM2.23 SiPM2.28 SiPM2.33 SiPM2.38 SiPM3.3 SiPM3.8 SiPM3.13 SiPM3.18 SiPM3.23 SiPM3.28 SiPM3.33 SiPM3.38 SiPM4.3 SiPM4.8 SiPM4.13 SiPM4.18 SiPM4.23 SiPM4.28 SiPM4.33 SiPM4.38

## Polygon pours and split planes (outlines as drawn)
GND on Bottom Layer "gnd_bot" (solid, remove dead copper, pour order 5): -19.304,14.986 -19.304,-15.24 19.304,-15.24 19.304,14.986
+HV_4 on X "HV4" (solid, pour order 15): 0.813,-1.041 0.838,-1.016 19.253,-1.016 19.253,-15.138 19.253,-15.24 19.152,-15.24 0.813,-15.24
+HV_3 on X "HV3" (solid, remove dead copper, pour order 13): -19.253,-1.041 -19.228,-1.016 -0.813,-1.016 -0.813,-15.138 -0.813,-15.24 -0.914,-15.24 -19.253,-15.24
+HV_2 on X "HV2" (solid, remove dead copper, pour order 11): 0.813,14.935 0.838,14.961 19.253,14.961 19.253,0.838 19.253,0.737 19.152,0.737 0.813,0.737
+HV_1 on X "HV1" (solid, remove dead copper, pour order 9): -19.228,14.935 -19.202,14.961 -0.787,14.961 -0.787,0.838 -0.787,0.737 -0.889,0.737 -19.228,0.737

## Keep-outs
Keep-Out Layer:
  the board outline again, w0.2

## Text inside footprints (layer, text, board x,y; h text height)
SiPM1: Mechanical 1 "J1" at -7.028,7.007 h0.76 r270
SiPM2: Mechanical 1 "J1" at 6.012,7.017 h0.76 r270
SiPM3: Mechanical 1 "J1" at -7.028,-6.013 h0.76 r270
SiPM4: Mechanical 1 "J1" at 6.012,-6.023 h0.76 r270
XBot: Mechanical 1 "J1" at 15.492,-0.497 h0.76 r270
YBot: Mechanical 1 "J1" at -15.492,0.497 h0.76 r90